# Altium PCB rpi_shield.PcbDoc
Units mm, origin at the board's own origin, x right, y up, seen from the top; angles counter-clockwise.
Board outline 35 x 45 mm, 2 copper layers (Top Layer, Bottom Layer); 19 components, 21 nets, 81 pads, 59 vias.
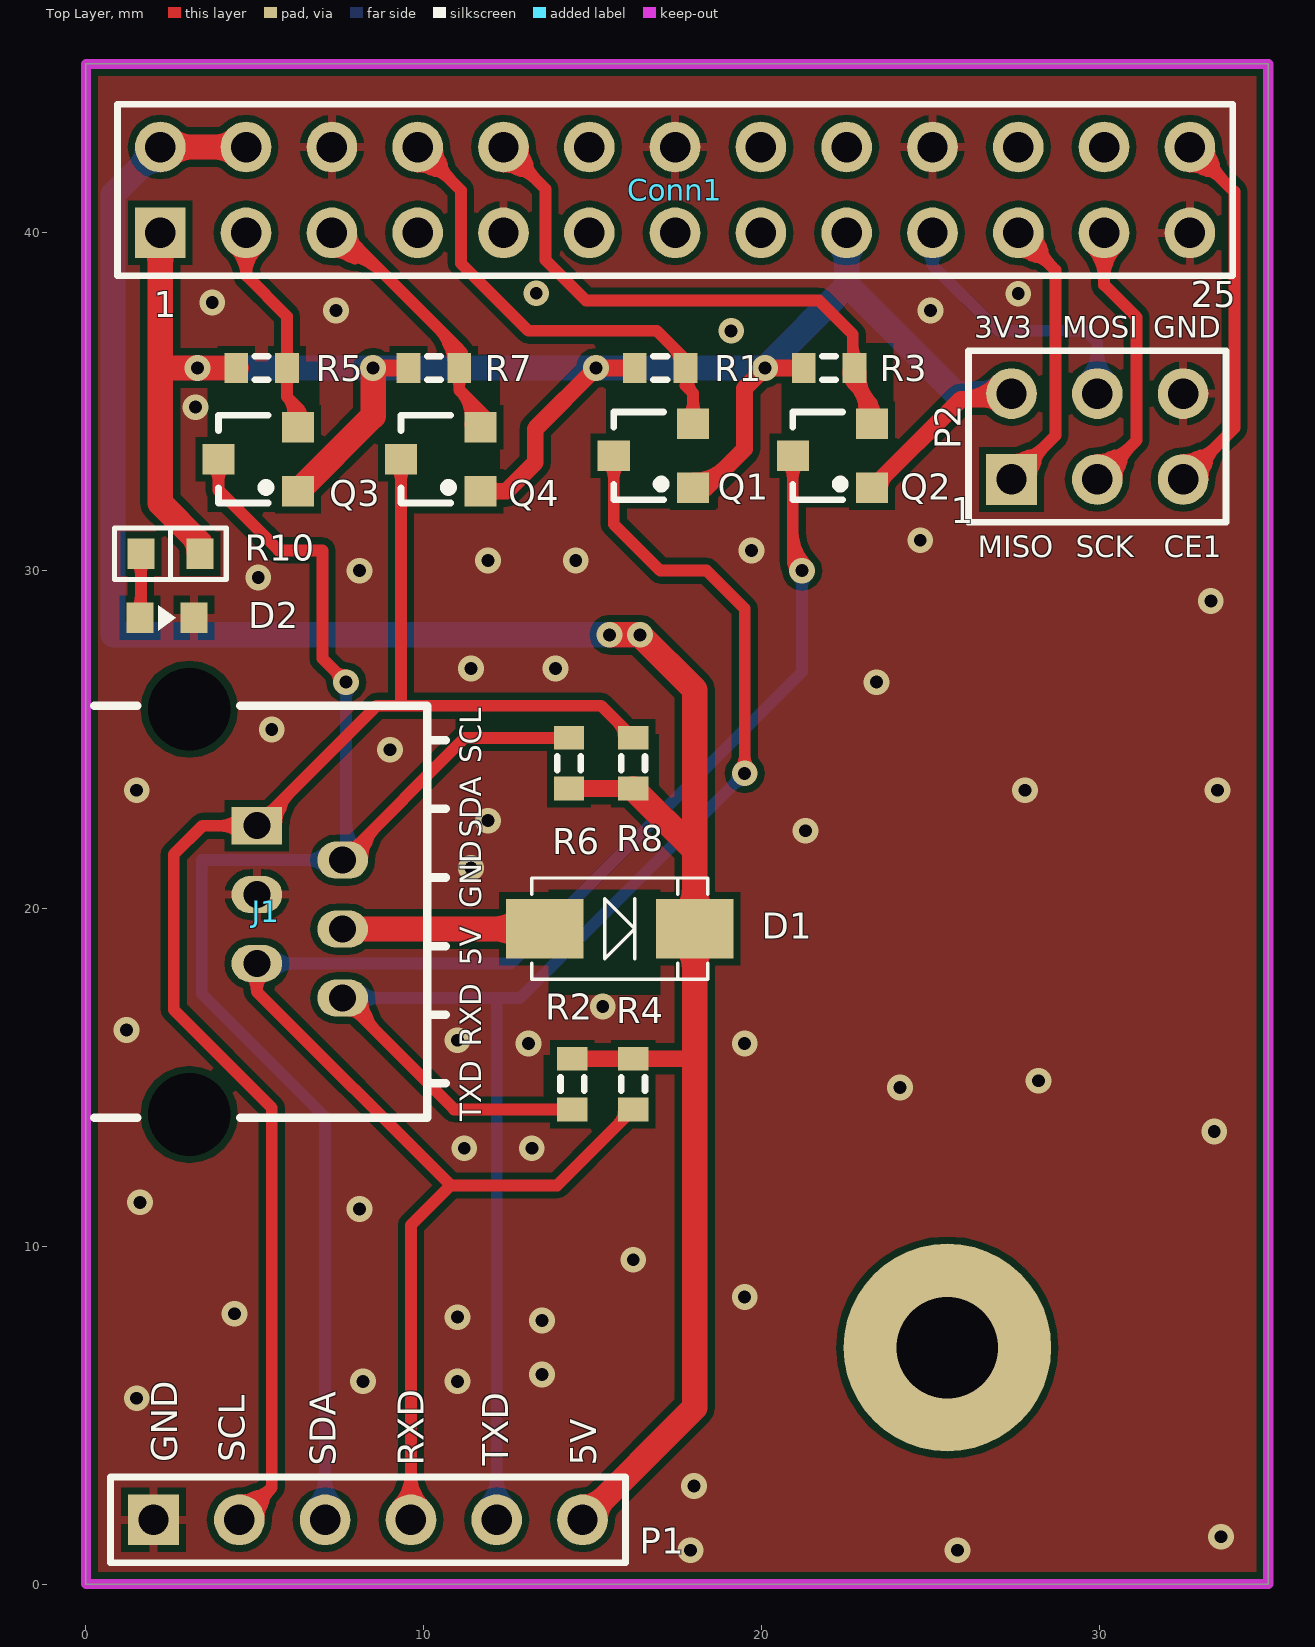
[diagram p0: Top Layer view]
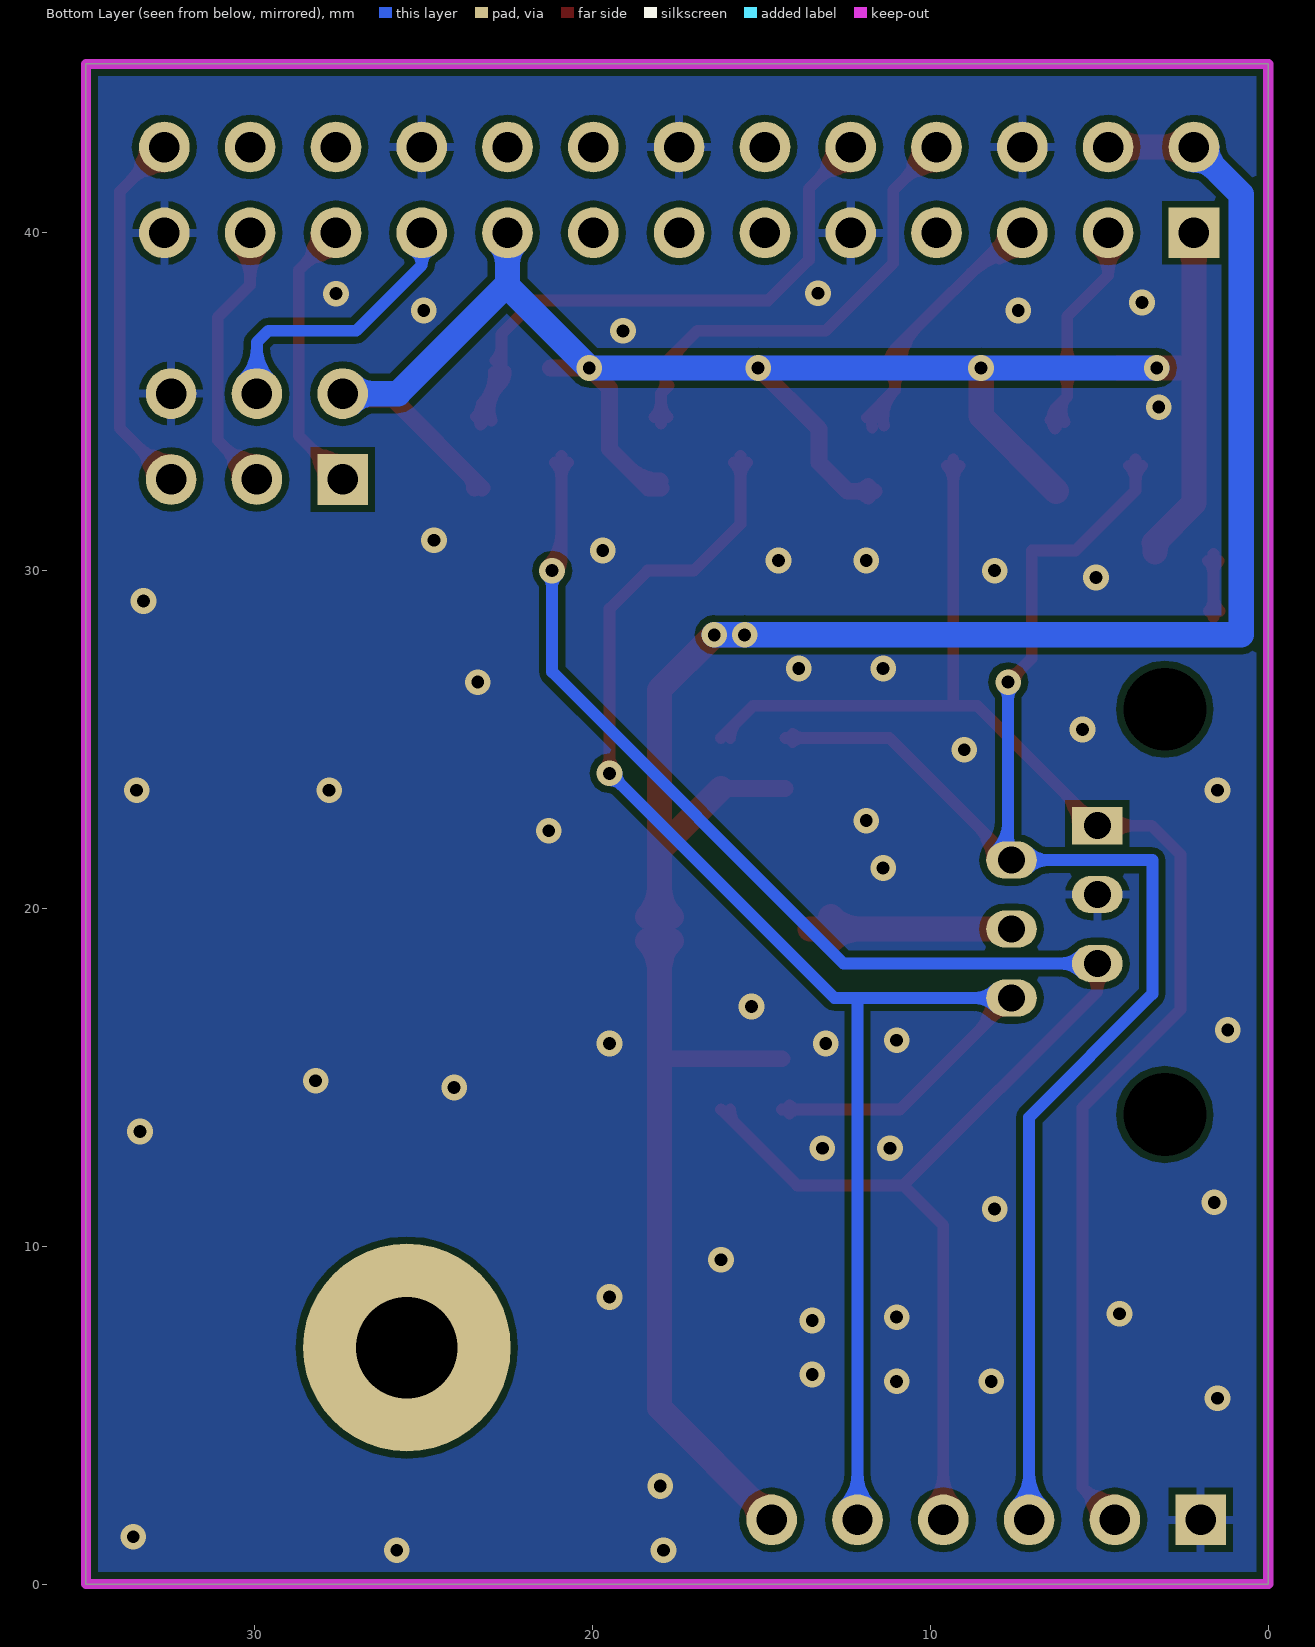
[diagram p1: Bottom Layer view, seen from below]

## Layer stack, top to bottom
Top Layer: signal copper 0.0356
Dielectric: dielectric 0.32, FR-4, Dk 4.8
Bottom Layer: signal copper 0.0356

## Board outline
0,0 35,0 35,45 0,45 0,0

## Design rules (kind name [scope] priority, off if disabled: settings)
Clearance [All] p1: gap=0.2
PolygonConnect via [isvia] p1: connectstyle=Direct reliefconductorwidth=0.254 reliefentries=4 polygonreliefangle="90 Angle"
PolygonConnect [All] p2: connectstyle=Relief reliefconductorwidth=0.254 reliefentries=4 polygonreliefangle="90 Angle"
RoutingVias [All] p1: holewidth=0.6 width=1 viastyle="Through Hole" minholewidth=0.711 minwidth=1.27 maxholewidth=0.711 maxwidth=1.27
SilkscreenOverComponentPads [All] p1 off: minsilkscreentomaskgap=0.254
SolderMaskExpansion [All] p1: expansion=0.102
Width [All] p1: maxlimit=0.8 minlimit=0.2 preferedwidth=0.35
27 further rules are at their usual default settings.

## Components (designator, comment, footprint, x,y, rotation, side; value= is the part's Value field where it differs from the comment)
Conn1 "RPI_CONN" HDR2X13 2.2,40 r0 top
D1 "Diode" DO-214 15.8,19.4 r0 top
D2 "LED_Red" D0603_B 2.4,28.6 r0 top
J1 "RJ11-B" PCB-606 7.6,19.9 r90 top
P1 "Header 6" HDR1X6 2,1.9 r0 top
P2 "Header 3X2" HDR2X3 27.4,32.7 r0 top
Q1 "NMOS-2" SOT-23-3 16.8,33.4 r90 top
Q2 "NMOS-2" SOT-23-3 22.1,33.4 r90 top
Q3 "NMOS-2" SOT-23-3 5.1,33.3 r90 top
Q4 "NMOS-2" SOT-23-3 10.5,33.3 r90 top
R1 "Res3" J1-0603 17,36 r180 top
R2 "Res3" J1-0603 14.4,14.8 r270 top
R3 "Res3" J1-0603 22,36 r180 top
R4 "Res3" J1-0603 16.2,14.8 r270 top
R5 "Res3" J1-0603 5.2,36 r180 top
R6 "Res3" J1-0603 14.3,24.3 r90 top
R7 "Res3" J1-0603 10.3,36 r180 top
R8 "Res3" J1-0603 16.2,24.3 r90 top
R10 "Res2" R0603 2.5,30.5 r180 top

## Footprints (in the part's own frame and the unit in brackets; to place one, negate y for a bottom-side part, rotate by r counter-clockwise, add the part's x,y. Pads: shape width x height; smd on the part's side, far side on the other; paste and mask are expansions set on the pad)
D0603_B [mm]
  rect 0.8x0.9 smd: 1(-0.8,0) 2(0.8,0)
  silkscreen extent -0.25,-0.38 0.25,0.38, body extent -0.76,-0.38 0.76,0.38, height 0.81
DO-214 [mm]
  rect 2.3x1.75 smd: 1(-2.222,0) 2(2.222,0)
  silkscreen extent -2.6,-1.5 2.6,1.5, body extent -2.3,-1.35 2.3,1.35, height 2.4
HDR1X6 [mm] "Connector; Header; 6 Position"
  rect 1.5x1.5 hole 0.9: 1(0,0)
  round 1.5 hole 0.9: 2(2.54,0) 3(5.08,0) 4(7.62,0) 5(10.16,0) 6(12.7,0)
  silkscreen extent -1.27,-1.27 13.97,1.27
HDR2X3 [mm] "Connector; Header; 3x2 Position"
  rect 1.5x1.5 hole 0.9: 1(0,0)
  round 1.5 hole 0.9: 2(0,2.54) 3(2.54,0) 4(2.54,2.54) 5(5.08,0) 6(5.08,2.54)
  silkscreen extent -1.27,-1.27 6.35,3.81
HDR2X13 [mm] "Connector; Header; 13x2 Position"
  rect 1.5x1.5 hole 0.9: 1(0,0)
  round 1.5 hole 0.9: 2(0,2.54) 3(2.54,0) 4(2.54,2.54) 5(5.08,0) 6(5.08,2.54) 7(7.62,0) 8(7.62,2.54) 9(10.16,0) 10(10.16,2.54) 11(12.7,0) 12(12.7,2.54) 13(15.24,0) 14(15.24,2.54) 15(17.78,0) 16(17.78,2.54) 17(20.32,0) 18(20.32,2.54) 19(22.86,0) 20(22.86,2.54) 21(25.4,0) 22(25.4,2.54) 23(27.94,0) 24(27.94,2.54) 25(30.48,0) 26(30.48,2.54)
  silkscreen extent -1.27,-1.27 31.75,3.81
J1-0603 [mm] "Chip Resistor, Body 1.6x0.8mm, IPC High Density"
  rect 0.7x0.9 smd: 1(-0.75,0) 2(0.75,0)
  silkscreen extent -0.2,-0.35 0.2,0.35, body extent -0.85,-0.48 0.85,0.48, height 0.9
PCB-606 [mm]
  round 2.4 hole 2.45: 0(-6,4.54) 0(6,4.54)
  rect 1.1x1.5 hole 0.8: 1(2.55,2.54)
  oval 1.1x1.5 hole 0.8: 2(1.53,0) 3(0.51,2.54) 4(-0.51,0) 5(-1.53,2.54) 6(-2.55,0)
  silkscreen extent -6.1,-3.05 6.1,7.35, body extent -5.99,-2.44 6.21,10.56, height 14.54
R0603 [mm]
  rect 0.8x0.9 smd: 1(-0.875,0) 2(0.875,0)
  silkscreen extent -1.65,-0.76 1.65,0.76, body extent -0.8,-0.4 0.8,0.4, height 0.45
SOT-23-3 [mm]
  rect 0.9x0.95 smd: 1(-0.95,-1.175) 2(0.95,-1.175) 3(0,1.175)
  silkscreen extent -1.3,-0.35 1.3,1.18, body extent -1.48,-1.37 1.52,1.27, height 1.08

## Part data
D1: "Default Diode"
D2: library part LED3, "Typical BLUE SiC LED"
P1: "Header, 6-Pin"
P2: "Header, 3-Pin, Dual row"
Q1 Q2 Q3 Q4: "N-Channel Power MOSFET"
R1 R2 R3 R4 R5 R6 R7 R8 R10: "Resistor"

## Free pads (board coordinates)
  round 6.15 hole 3: hole(25.5,7)

## Via types
v1: diameter 0.762, hole 0.381, Top Layer to Bottom Layer, tented both sides, 59 vias

## Nets (pads, with @x,y where several pads share a name; then routed paths per layer and width w, separated by ;. In a path a pad name is that pad's centre, name@x,y a point inside that pad or via, vN(x,y) a via of type N, cw(c..) or ccw(c..) an arc to the next point about the centre after c; other vN are vias at no path point)
5V: D1.1 J1.4 | length 9.8
  Top Layer w0.75: J1.4 D1.1@13.568,19.39 ; 12.071,19.39 ccw(c12.071,20.631) 12.949,19.754 cw(c12.071,20.631) 12.071,19.39 ; 12.12,19.39 cw(c12.12,18.217) 12.949,19.046 ccw(c12.12,18.217) 12.12,19.39
CE1: Conn1.26 P2.5 | length 23.7
  Top Layer w0.35: P2.5@32.358,32.725 cw(c33.243,32.544) 33.009,33.417 ; P2.5 34,34.22 34,41.22 Conn1.26 ; P2.5@32.505,32.578 ccw(c32.324,33.463) 33.197,33.229 ; Conn1.26@32.558,42.515 ccw(c33.443,42.696) 33.209,41.823 ; Conn1.26@32.705,42.662 cw(c32.524,41.777) 33.397,42.011 ; 33.462,33.682 cw(c32.48,34.663) 32.48,33.275 ccw(c32.48,34.663) 33.462,33.682 ; 33.462,33.682 ccw(c34.443,32.7) 33.055,32.7 cw(c34.443,32.7) 33.462,33.682 ; 33.662,41.558 cw(c34.643,42.54) 33.255,42.54 ccw(c34.643,42.54) 33.662,41.558 ; 33.662,41.558 ccw(c32.68,40.577) 32.68,41.965 cw(c32.68,40.577) 33.662,41.558
GND: Conn1.6 Conn1.9 Conn1.14 Conn1.20 Conn1.25 D2.2 J1.3 P1.1 P2.6
  other v1: 17.9,1 25.8,1 33.6,1.4 18,2.9 1.5,5.5 8.2,6 11,6 13.5,6.2 13.5,7.8 11,7.9 4.4,8 19.5,8.5 16.2,9.6 8.1,11.1 1.6,11.3 11.2,12.9 13.2,12.9 33.4,13.4 24.1,14.7 28.2,14.9 13.1,16 19.5,16 11,16.1 1.2,16.4 15.3,17.1 11.4,21.2 21.3,22.3 11.9,22.6 1.5,23.5 27.8,23.5 33.5,23.5 9,24.7 5.5,25.3 23.4,26.7 11.4,27.1 13.9,27.1 33.3,29.1 5.1,29.8 8.1,30 11.9,30.3 14.5,30.3 19.7,30.6 24.7,30.9 3.24,34.84 19.1,37.1 7.4,37.7 25,37.7 3.74,37.94 27.6,38.2 13.329,38.212
MISO_B: Conn1.21 P2.1 | length 21
  Top Layer w0.35: P2.1@27.278,32.725 cw(c28.163,32.544) P2.1@27.929,33.417 ; P2.1 28.7,34 28.7,38.9 Conn1.21 ; P2.1@27.425,32.578 ccw(c27.244,33.463) P2.1@28.117,33.229 ; Conn1.21@27.478,39.975 ccw(c28.363,40.156) 28.129,39.283 ; Conn1.21@27.625,40.122 cw(c27.444,39.237) 28.317,39.471 ; 28.382,33.682 cw(c27.4,34.663) 27.4,33.275 ccw(c27.4,34.663) 28.382,33.682 ; 28.382,33.682 ccw(c29.363,32.7) 27.975,32.7 cw(c29.363,32.7) 28.382,33.682 ; 28.582,39.018 cw(c29.563,40) 28.175,40 ccw(c29.563,40) 28.582,39.018 ; 28.582,39.018 ccw(c27.6,38.037) 27.6,39.425 cw(c27.6,38.037) 28.582,39.018
MOSI_B: Conn1.19 P2.4 | length 14.9
  Bottom Layer w0.35: Conn1.19 25.06,39.04 ; P2.4 29.94,36.76 29.6,37.1 27,37.1 25.06,39.04 ; 25.06,39.04 cw(c25.574,39.04) 25.331,39.493 ccw(c25.574,39.04) 25.06,39.04 ; 25.06,39.04 ccw(c24.546,39.04) 24.789,39.493 cw(c24.546,39.04) 25.06,39.04 ; 29.94,36.628 cw(c28.552,36.628) 29.533,35.647 ccw(c28.552,36.628) 29.94,36.628 ; 29.94,36.628 ccw(c31.328,36.628) 30.347,35.647 cw(c31.328,36.628) 29.94,36.628
NetD2_1: D2.1 R10.2 | length 5.3
  Top Layer w0.35: D2.1@1.625,28.625 R10.2 ; 1.625,29.907 cw(c2.168,29.907) 1.784,30.291 ccw(c2.168,29.907) 1.625,29.907 ; 1.625,29.907 ccw(c1.082,29.907) 1.466,30.291 cw(c1.082,29.907) 1.625,29.907 ; D2.1@1.441,28.809 ccw(c0.996,29.254) 1.625,29.254 cw(c0.996,29.254) D2.1@1.441,28.809 ; 1.625,29.133 ccw(c2.083,29.133) 1.759,28.809 cw(c2.083,29.133) 1.625,29.133
RXD_3.3: Conn1.10 Q2.2 R3.1 | length 27.8
  Top Layer w0.35: Conn1.10@12.238,42.515 ccw(c13.123,42.696) 12.889,41.823 ; Conn1.10 13.6,41.3 13.6,39.2 14.8,38 21.7,38 22.7,37 R3.1@22.7,36 ; Conn1.10@12.385,42.662 cw(c12.204,41.777) 13.077,42.011 ; R3.1@22.575,35.912 ccw(c23.11,35.875) 22.731,35.496 ; R3.1@22.925,35.888 ccw(c24.128,35.805) 23.275,34.953 ; Q2.2@22.99,34.439 ccw(c22.039,34.766) 22.75,35.477 23.275,34.953 ; Q2.2@23.095,34.558 ccw(c22.753,34.952) 23.275,34.952 ; 23.146,35.081 cw(c22.629,34.564) Q2.2@23.321,34.326 ; Q2.2 23.275,34.953 ; Q2.2@23.455,34.558 cw(c23.797,34.952) 23.275,34.952 ; 13.342,41.558 cw(c14.323,42.54) 12.935,42.54 ccw(c14.323,42.54) 13.342,41.558 ; 13.342,41.558 ccw(c12.36,40.577) 12.36,41.965 cw(c12.36,40.577) 13.342,41.558 ; 22.7,36.643 ccw(c23.293,36.643) 22.874,36.224 cw(c23.293,36.643) 22.7,36.643
RXD_5: J1.5 P1.4 Q2.3 R4.2 | length 66.7
  Top Layer w0.35: J1.5 5.06,17.54 ; P1.4 9.62,10.62 10.8,11.8 ; R4.2 13.95,11.8 10.8,11.8 ; Q2.3@20.731,33.206 cw(c20.261,32.736) 20.925,32.736 cw(c21.589,32.736) Q2.3@21.119,33.206 ; 20.925,30.316 ccw(c21.516,30.316) v1@21.098,29.898 ; 20.925,31.161 ccw(c22.361,31.161) v1@21.346,30.146 ; Q2.3 20.925,30.275 ; v1@20.998,30.039 ccw(c20.738,30.088) 20.925,30.275 ; v1@21.161,30.202 cw(c21.112,30.462) 20.925,30.275 ; v1(21.2,30) 20.925,30.275 ; 5.06,17.54 cw(c5.791,17.54) 5.308,18.089 ccw(c5.791,17.54) 5.06,17.54 ; 5.06,17.54 ccw(c4.329,17.54) 4.812,18.089 cw(c4.329,17.54) 5.06,17.54 ; 5.06,17.54 10.8,11.8 ; 9.62,3.288 cw(c8.232,3.288) 9.213,2.307 ccw(c8.232,3.288) 9.62,3.288 ; 9.62,3.288 ccw(c11.008,3.288) 10.027,2.307 cw(c11.008,3.288) 9.62,3.288 ; 15.731,13.581 ccw(c15.261,14.05) 15.925,14.05 cw(c15.261,14.05) 15.731,13.581
  Bottom Layer w0.35: J1.5 12.57,18.37 21.2,27 v1@21.2,30.1 ; v1@21.054,29.854 cw(c20.703,29.503) 21.2,29.503 cw(c21.697,29.503) v1@21.346,29.854 ; 6.165,18.37 cw(c6.165,19.275) 5.525,18.635 ccw(c6.165,19.275) 6.165,18.37 ; 6.165,18.37 ccw(c6.165,17.465) 5.525,18.105 cw(c6.165,17.465) 6.165,18.37
SCK_B: Conn1.23 P2.3 | length 18.9
  Top Layer w0.35: P2.3@29.818,32.725 cw(c30.703,32.544) 30.469,33.417 ; P2.3 31.1,33.86 31.1,37.5 30.14,38.46 Conn1.23 ; P2.3@29.965,32.578 ccw(c29.784,33.463) 30.657,33.229 ; 30.14,38.612 cw(c31.528,38.612) 30.547,39.593 ccw(c31.528,38.612) 30.14,38.612 ; 30.14,38.612 ccw(c28.752,38.612) 29.733,39.593 cw(c28.752,38.612) 30.14,38.612 ; 30.922,33.682 cw(c29.94,34.663) 29.94,33.275 ccw(c29.94,34.663) 30.922,33.682 ; 30.922,33.682 ccw(c31.903,32.7) 30.515,32.7 cw(c31.903,32.7) 30.922,33.682
SCL_3.3: Conn1.5 Q4.2 R7.1 | length 24.3
  Top Layer w0.35: Conn1.5@7.163,39.955 ccw(c8.261,40.381) 7.956,39.244 ; Conn1.5 7.6,40 11.05,36.55 R7.1 11.05,35.35 ; Conn1.5@7.568,39.502 cw(c7.891,38.942) 8.058,39.567 ; 10.672,36.859 ccw(c11.637,37.117) R7.1@11.137,36.252 ; Q4.2@11.379,34.299 ccw(c10.21,34.509) 11.05,35.35 ; 11.523,34.877 cw(c11.012,34.365) Q4.2@11.724,34.237 ; Q4.2@11.875,34.525 11.05,35.35 ; 11.05,35.478 cw(c11.472,35.478) 11.174,35.776 ccw(c11.472,35.478) 11.05,35.478 ; 11.05,35.478 ccw(c10.628,35.478) 10.926,35.776 cw(c10.628,35.478) 11.05,35.478 ; 11.05,36.522 cw(c10.628,36.522) 10.926,36.224 ccw(c10.628,36.522) 11.05,36.522 ; 11.05,36.522 ccw(c11.472,36.522) 11.174,36.224 cw(c11.472,36.522) 11.05,36.522 ; Conn1.5@7.28,39.425 cw(c7.28,37.264) 8.808,38.792 ccw(c7.28,37.264) Conn1.5@7.28,39.425 ; Conn1.5@7.28,39.775 cw(c7.28,38.459) 8.21,39.39 ccw(c7.28,38.459) Conn1.5@7.28,39.775 ; Conn1.5@7.855,40 ccw(c8.471,40) 8.035,39.565 cw(c8.471,40) Conn1.5@7.855,40 ; 10.433,37.167 cw(c9.366,36.1) 10.875,36.1 ccw(c9.366,36.1) 10.433,37.167 ; 11.031,36.569 cw(c10.561,36.1) 11.225,36.1 ccw(c10.561,36.1) 11.031,36.569
SCL_5: J1.1 P1.2 Q4.3 R8.2 | length 59.3
  Top Layer w0.35: P1.2@4.418,1.929 cw(c5.32,1.713) 5.094,2.612 ; P1.2 5.5,2.86 ; P1.2@4.569,1.778 ccw(c4.353,2.68) 5.252,2.454 ; J1.1@5.251,22.473 ccw(c4.927,23.324) 5.806,23.088 ; Q4.3@9.131,33.106 cw(c8.661,32.636) 9.325,32.636 cw(c9.989,32.636) Q4.3@9.519,33.106 ; 9.325,26.025 Q4.3 ; R8.2 15.25,26 8.61,26 J1.1 3.45,22.45 2.6,21.6 2.6,17 5.5,14.1 5.5,2.86 ; 3.955,22.45 cw(c3.955,21.545) 4.595,22.185 ccw(c3.955,21.545) 3.955,22.45 ; 3.955,22.45 ccw(c3.955,23.355) 4.595,22.715 cw(c3.955,23.355) 3.955,22.45 ; 5.5,2.86 cw(c4.57,3.79) 4.549,2.475 ccw(c4.57,3.79) 5.5,2.86 ; 5.5,2.86 ccw(c6.43,1.93) 5.115,1.909 cw(c6.43,1.93) 5.5,2.86 ; J1.1@5.26,22.825 ccw(c5.26,23.247) 5.559,22.949 cw(c5.26,23.247) J1.1@5.26,22.825 ; J1.1@5.635,22.45 cw(c7.023,22.45) 6.042,23.432 ccw(c7.023,22.45) J1.1@5.635,22.45 ; 15.731,25.519 cw(c15.261,25.05) 15.925,25.05 ccw(c15.261,25.05) 15.731,25.519
SDA_3.3: Conn1.3 Q3.2 R5.1 | length 14.6
  Top Layer w0.35: Conn1.3 4.74,38.74 ; R5.1 5.95,37.53 4.74,38.74 ; Q3.2@6.022,34.404 ccw(c5.533,34.733) 5.95,35.15 ; Q3.2@6.102,34.464 ccw(c5.811,34.825) 6.275,34.825 ; 6.25,34.85 cw(c5.892,34.491) Q3.2@6.312,34.208 ; Q3.2 6.275,34.825 ; Q3.2@6.448,34.464 cw(c6.739,34.825) 6.275,34.825 ; 4.74,38.74 cw(c5.833,38.74) 5.117,39.566 ccw(c5.833,38.74) 4.74,38.74 ; 4.74,38.74 ccw(c3.647,38.74) 4.363,39.566 cw(c3.647,38.74) 4.74,38.74 ; 5.95,35.15 6.275,34.825 ; 5.95,35.15 5.95,35.478 ; 5.95,35.478 cw(c6.372,35.478) 6.074,35.776 ccw(c6.372,35.478) 5.95,35.478 ; 5.95,35.478 ccw(c5.528,35.478) 5.826,35.776 cw(c5.528,35.478) 5.95,35.478 ; 5.95,36.522 cw(c5.528,36.522) 5.826,36.224 ccw(c5.528,36.522) 5.95,36.522 ; 5.95,36.522 ccw(c6.372,36.522) 6.074,36.224 cw(c6.372,36.522) 5.95,36.522
SDA_5: J1.2 P1.3 Q3.3 R6.2 | length 64.7
  Top Layer w0.35: Q3.3@3.731,33.106 cw(c3.261,32.636) 3.925,32.636 cw(c4.589,32.636) Q3.3@4.119,33.106 ; Q3.3 3.925,32.375 5.7,30.6 7,30.6 7,27.4 v1(7.7,26.7) ; J1.2 11.22,25.05 R6.2 ; J1.2@7.791,21.453 ccw(c7.467,22.304) 8.346,22.068 ; 7.348,27.052 cw(c6.997,26.7) 7.494,26.7 ccw(c6.997,26.7) 7.348,27.052 ; 7.348,27.052 ccw(c7.7,27.403) 7.7,26.906 cw(c7.7,27.403) 7.348,27.052 ; 13.778,25.05 cw(c13.778,24.628) 14.076,24.926 ccw(c13.778,24.628) 13.778,25.05 ; 13.778,25.05 ccw(c13.778,25.472) 14.076,25.174 cw(c13.778,25.472) 13.778,25.05 ; J1.2@7.8,21.805 ccw(c7.8,22.227) 8.099,21.929 cw(c7.8,22.227) J1.2@7.8,21.805 ; J1.2@8.175,21.43 cw(c9.563,21.43) 8.582,22.412 ccw(c9.563,21.43) J1.2@8.175,21.43
  Bottom Layer w0.35: P1.3@6.673,2.307 ccw(c5.692,3.288) 7.08,3.288 ccw(c8.468,3.288) P1.3@7.487,2.307 ; P1.3 7.08,13.82 3.43,17.47 3.43,21.43 J1.2 7.7,21.53 v1(7.7,26.7) ; 6.495,21.43 cw(c6.495,20.525) 7.135,21.165 ccw(c6.495,20.525) 6.495,21.43 ; 6.495,21.43 ccw(c6.495,22.335) 7.135,21.695 cw(c6.495,22.335) 6.495,21.43 ; 7.7,26.203 cw(c8.197,26.203) 7.846,26.554 ccw(c8.197,26.203) 7.7,26.203 ; 7.7,26.203 ccw(c7.203,26.203) 7.554,26.554 cw(c7.203,26.203) 7.7,26.203 ; J1.2@7.535,21.695 ccw(c7.136,22.094) 7.7,22.094 cw(c7.136,22.094) J1.2@7.535,21.695 ; 7.7,22.577 ccw(c8.947,22.577) 8.065,21.695 cw(c8.947,22.577) 7.7,22.577
TFT_BL: Conn1.16
TFT_CS: Conn1.24
TFT_RS: Conn1.18
TFT_RST: Conn1.22
TXD_3.3: Conn1.8 Q1.2 R1.1 | length 22.3
  Top Layer w0.35: Conn1.8@9.698,42.515 ccw(c10.583,42.696) 10.349,41.823 ; Conn1.8 11.1,41.26 11.1,39.1 13.1,37.1 16.9,37.1 R1.1@17.8,36.2 ; Conn1.8@9.845,42.662 cw(c9.664,41.777) 10.537,42.011 ; 17.75,35.478 17.975,35.253 ; Q1.2@17.781,34.544 ccw(c17.311,35.014) 17.975,35.014 ccw(c18.639,35.014) Q1.2@18.169,34.544 ; R1.1@17.901,35.812 ccw(c18.303,35.58) 17.975,35.253 ; Q1.2 17.975,35.253 ; 10.802,41.558 cw(c11.783,42.54) 10.395,42.54 ccw(c11.783,42.54) 10.802,41.558 ; 10.802,41.558 ccw(c9.82,40.577) 9.82,41.965 cw(c9.82,40.577) 10.802,41.558 ; 17.345,36.655 cw(c16.79,36.1) 17.575,36.1 ccw(c16.79,36.1) 17.345,36.655
TXD_5: J1.6 P1.5 Q1.3 R2.2 | length 66.4
  Top Layer w0.35: J1.6 10.9,14.05 R2.2 ; J1.6@7.791,17.327 cw(c7.467,16.476) 8.346,16.712 ; Q1.3@15.431,33.206 cw(c14.961,32.736) 15.625,32.736 cw(c16.289,32.736) Q1.3@15.819,33.206 ; Q1.3 15.625,31.375 17,30 18.375,30 19.5,28.875 v1(19.5,24) ; 13.878,14.05 cw(c13.878,13.628) 14.176,13.926 ccw(c13.878,13.628) 13.878,14.05 ; 13.878,14.05 ccw(c13.878,14.472) 14.176,14.174 cw(c13.878,14.472) 13.878,14.05 ; 19.5,24.497 cw(c19.003,24.497) 19.354,24.146 ccw(c19.003,24.497) 19.5,24.497 ; 19.5,24.497 ccw(c19.997,24.497) 19.646,24.146 cw(c19.997,24.497) 19.5,24.497 ; J1.6@7.8,16.975 cw(c7.8,16.553) 8.099,16.851 ccw(c7.8,16.553) J1.6@7.8,16.975 ; J1.6@8.175,17.35 ccw(c9.563,17.35) 8.582,16.368 cw(c9.563,17.35) J1.6@8.175,17.35
  Bottom Layer w0.35: J1.6 12.85,17.35 v1(19.5,24) ; P1.5 12.16,17.3 ; 8.705,17.35 cw(c8.705,18.255) 8.065,17.615 ccw(c8.705,18.255) 8.705,17.35 ; 8.705,17.35 ccw(c8.705,16.445) 8.065,17.085 cw(c8.705,16.445) 8.705,17.35 ; 12.16,3.288 cw(c10.772,3.288) 11.753,2.307 ccw(c10.772,3.288) 12.16,3.288 ; 12.16,3.288 ccw(c13.548,3.288) 12.567,2.307 cw(c13.548,3.288) 12.16,3.288 ; 19.148,23.648 cw(c19.5,23.297) 19.5,23.794 ccw(c19.5,23.297) 19.148,23.648 ; 19.148,23.648 ccw(c18.797,24) 19.294,24 cw(c18.797,24) 19.148,23.648
VCC3.3: Conn1.1 Conn1.17 P2.2 Q1.1 Q2.1 Q3.1 Q4.1 R1.2 R3.2 R5.2 R7.2 R10.1 | length 80.5
  Top Layer w0.35: R10.1 R10.1@3.375,30.825 ; Conn1.17@22.52,39.78 Conn1.17
  Top Layer w0.5: v1(8.5,36) R7.2 ; Q4.1 12.45,32.35 13.3,33.2 13.3,34.2 v1(15.1,36) R1.2 ; Q4.1@11.841,32.209 cw(c12.183,31.867) 12.183,32.35 cw(c12.183,32.833) Q4.1@11.841,32.491 ; Q1.1 18.35,32.45 19.5,33.6 19.5,35.4 v1(20.1,36) R3.2 ; Q1.1@18,32.65 ccw(c18,33.978) 18.939,33.039 ; Q2.1 25.9,35.075 ; Q2.1@23.5,32.45 cw(c24.043,32.45) Q2.1@23.659,32.834 ; 26.591,35.075 cw(c26.591,34.431) P2.2@27.046,34.886 ; P2.2@27.029,35.576 cw(c25.9,36.599) 25.9,35.075 ; P2.2 27.235,35.075 25.9,35.075
  Top Layer w0.75: 2.2,36 R5.2 ; Conn1.1 2.2,32 R10.1@3.375,30.825 ; Q3.1 8.5,34.575 v1(8.5,36) ; 2.2,39.095 cw(c3.105,39.095) 2.465,39.735 ccw(c3.105,39.095) 2.2,39.095 ; 2.2,39.095 ccw(c1.295,39.095) 1.935,39.735 cw(c1.295,39.095) 2.2,39.095 ; 3.138,31.062 cw(c2.626,30.55) 3.35,30.55 ccw(c2.626,30.55) 3.138,31.062
  Bottom Layer w0.75: v1(3.3,36) v1(8.5,36) v1(15.1,36) v1(20.1,36) 22.52,38.42 Conn1.17 22.52,38.48 25.76,35.24 P2.2 ; P2.2@27.135,34.975 ccw(c26.495,34.335) 26.495,35.24 ccw(c26.495,36.145) P2.2@27.135,35.505 ; Conn1.17@22.255,39.735 cw(c21.615,39.095) 22.52,39.095 ; Conn1.17@22.255,39.735 cw(c21.615,39.095) 22.52,39.095 ; Conn1.17@22.255,39.735 cw(c21.615,39.095) 22.52,39.095 ; Conn1.17@22.255,39.735 cw(c21.615,39.095) 22.52,39.095 ; 22.52,39.095 cw(c23.425,39.095) Conn1.17@22.785,39.735 ; 22.52,39.095 cw(c23.425,39.095) Conn1.17@22.785,39.735 ; 22.52,39.095 cw(c23.425,39.095) Conn1.17@22.785,39.735 ; 22.52,39.095 cw(c23.425,39.095) Conn1.17@22.785,39.735
VCC5V: Conn1.2 Conn1.4 D1.2 P1.6 R2.1 R4.1 R6.1 R8.1 | length 89.2
  Top Layer w0.5: R6.1 R8.1 ; R2.1 R4.1 17.872,15.55
  Top Layer w0.75: Conn1.2 Conn1.4 ; P1.6 18.022,5.222 D1.2 18.022,21.728 ; v1(15.5,28.1) v1(16.4,28.1) 18.022,26.477 18.022,21.728 ; R8.1 18.022,21.728 ; 3.105,42.54 cw(c3.105,43.445) 2.465,42.805 ccw(c3.105,43.445) 3.105,42.54 ; 3.105,42.54 ccw(c3.105,41.635) 2.465,42.275 cw(c3.105,41.635) 3.105,42.54 ; 3.835,42.54 cw(c3.835,41.635) 4.475,42.275 ccw(c3.835,41.635) 3.835,42.54 ; 3.835,42.54 ccw(c3.835,43.445) 4.475,42.805 cw(c3.835,43.445) 3.835,42.54 ; 15.34,2.54 cw(c14.7,3.18) 14.7,2.275 ccw(c14.7,3.18) 15.34,2.54 ; 15.34,2.54 ccw(c15.98,1.9) 15.075,1.9 cw(c15.98,1.9) 15.34,2.54 ; 18.022,18.193 cw(c19.23,18.193) 18.376,19.046 ccw(c19.23,18.193) 18.022,18.193 ; 18.022,18.193 ccw(c16.815,18.193) 17.669,19.046 cw(c16.815,18.193) 18.022,18.193 ; 18.022,20.607 cw(c16.815,20.607) 17.669,19.754 ccw(c16.815,20.607) 18.022,20.607 ; 18.022,20.607 ccw(c19.23,20.607) 18.376,19.754 cw(c19.23,20.607) 18.022,20.607
  Bottom Layer w0.75: Conn1.2 0.8,41.14 0.8,28.1 v1(16.4,28.1) ; 1.56,41.9 cw(c2.2,41.26) 2.2,42.165 ccw(c2.2,41.26) 1.56,41.9 ; 1.56,41.9 ccw(c0.92,42.54) 1.825,42.54 cw(c0.92,42.54) 1.56,41.9
pads on no net: Conn1.7 Conn1.11 Conn1.12 Conn1.13 Conn1.15 J1.0

## Polygon pours and split planes (outlines as drawn)
GND on Top Layer "Top Layer-No Net" (solid, pour order 10): 0.2,45 0.2,0.6 -0.2,0.2 0,0 35,0 35,45
GND on Bottom Layer "Top Layer-No Net" (solid, pour order 12): 0,45 0,0 35,0 35,45

## Keep-outs
Keep-Out Layer:
  the board outline again, w0.3

## Other copper
Top Layer:
  pour cut-out: 15.4,36.6 15.4,31.85 18.7,31.85 18.7,36.6
  pour cut-out: 13.55,15.65 13.55,13.8 16.85,13.8 16.85,15.65
  pour cut-out: 13.7,20.55 13.7,17.45 17,17.45 17,20.55
  pour cut-out: 20.6,36.725 20.6,31.875 23.9,31.875 23.9,36.725
  pour cut-out: 8.95,36.393 8.95,31.7 12.25,31.7 12.25,36.393
  pour cut-out: 10.95,26.1 10.95,24.9 14.25,24.9 14.25,26.1
  pour cut-out: 3.6,36.182 3.6,31.75 6.9,31.75 6.9,36.182
  pour cut-out: 13.65,25.15 13.65,23.3 16.95,23.3 16.95,25.15

## Silkscreen, mask and mechanical layers (free items; w line width, h text height)
Top Overlay:
  text "3V3" at 26.3,36.9 h0.64
  text "MOSI" at 28.9,36.9 h0.64
  text "GND" at 31.6,36.9 h0.64
  text "MISO" at 26.4,30.4 h0.64
  text "SCK" at 29.3,30.4 h0.64
  text "CE1" at 31.9,30.4 h0.64
  text "SCL" at 11.7,24.3 h0.64 r90
  text "SDA" at 11.7,22.1 h0.64 r90
  text "GND" at 11.7,20 h0.64 r90
  text "5V" at 11.7,18.3 h0.64 r90
  text "RXD" at 11.7,15.9 h0.64 r90
  text "TXD" at 11.7,13.7 h0.64 r90
  text "GND" at 2.7,3.6 h0.76 r90
  text "SCL" at 4.7,3.6 h0.76 r90
  text "SDA" at 7.4,3.5 h0.76 r90
  text "RXD" at 10,3.5 h0.76 r90
  text "TXD" at 12.5,3.5 h0.76 r90
  text "5V" at 15.1,3.5 h0.76 r90

## Text inside footprints (layer, text, board x,y; h text height)
Conn1: Top Overlay "25" at 32.7,37.8 h0.76; Top Overlay "1" at 2,37.5 h0.76
P2: Top Overlay "1" at 25.6,31.4 h0.76